# EAGLE board devboard_kw2xd_v2.1 (EAGLE 8.4.1)
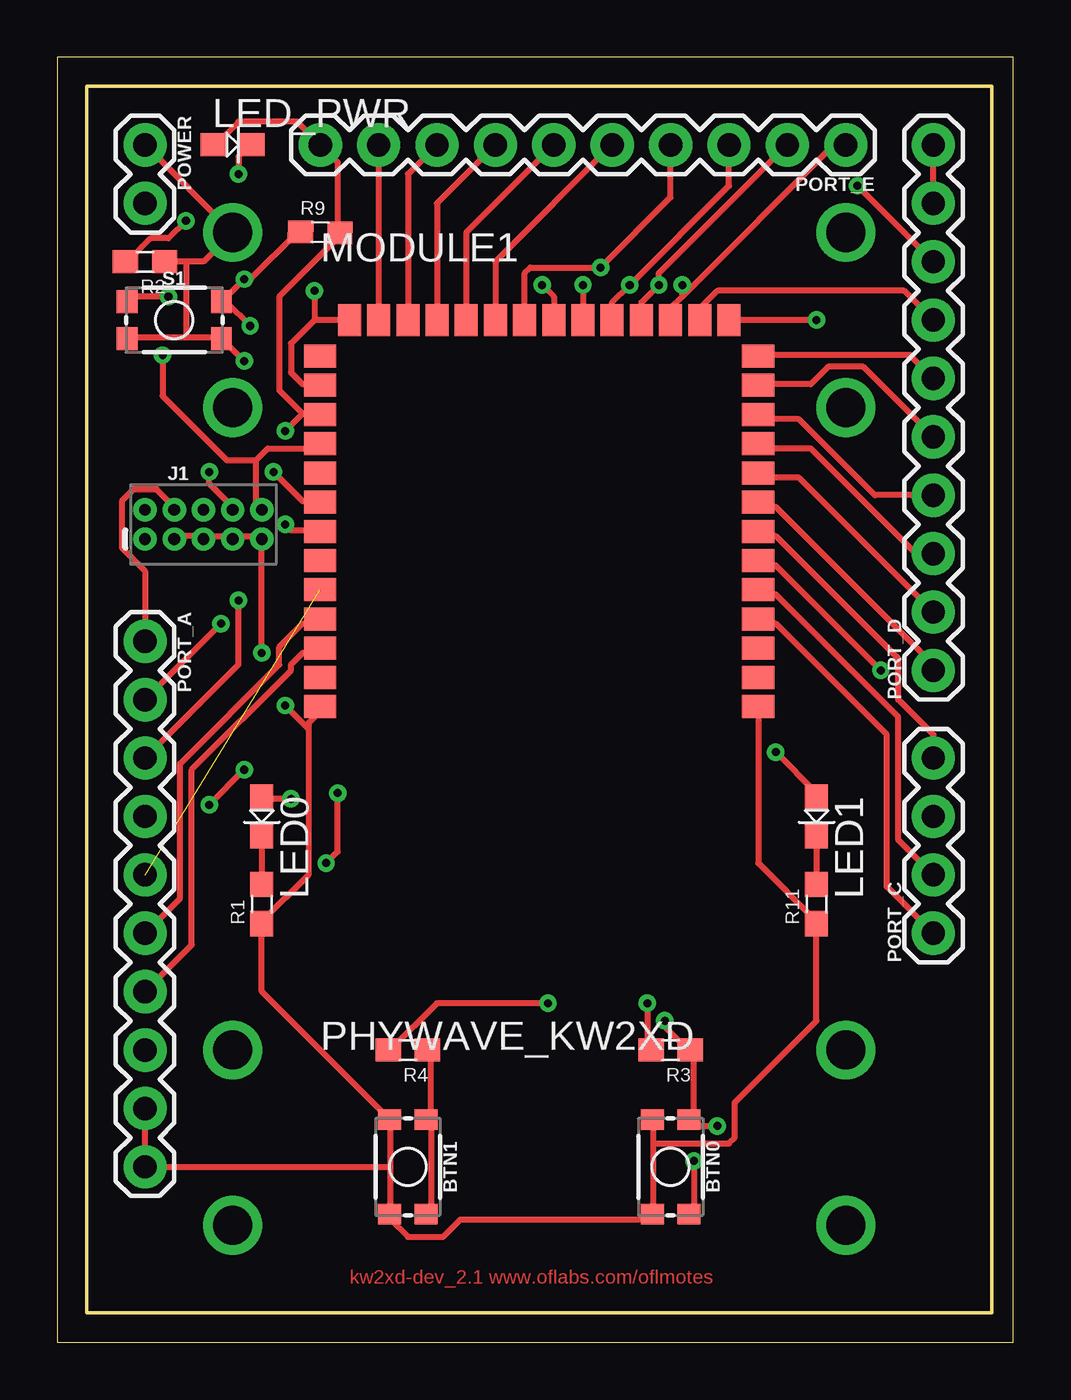
[diagram p0: board, top side]
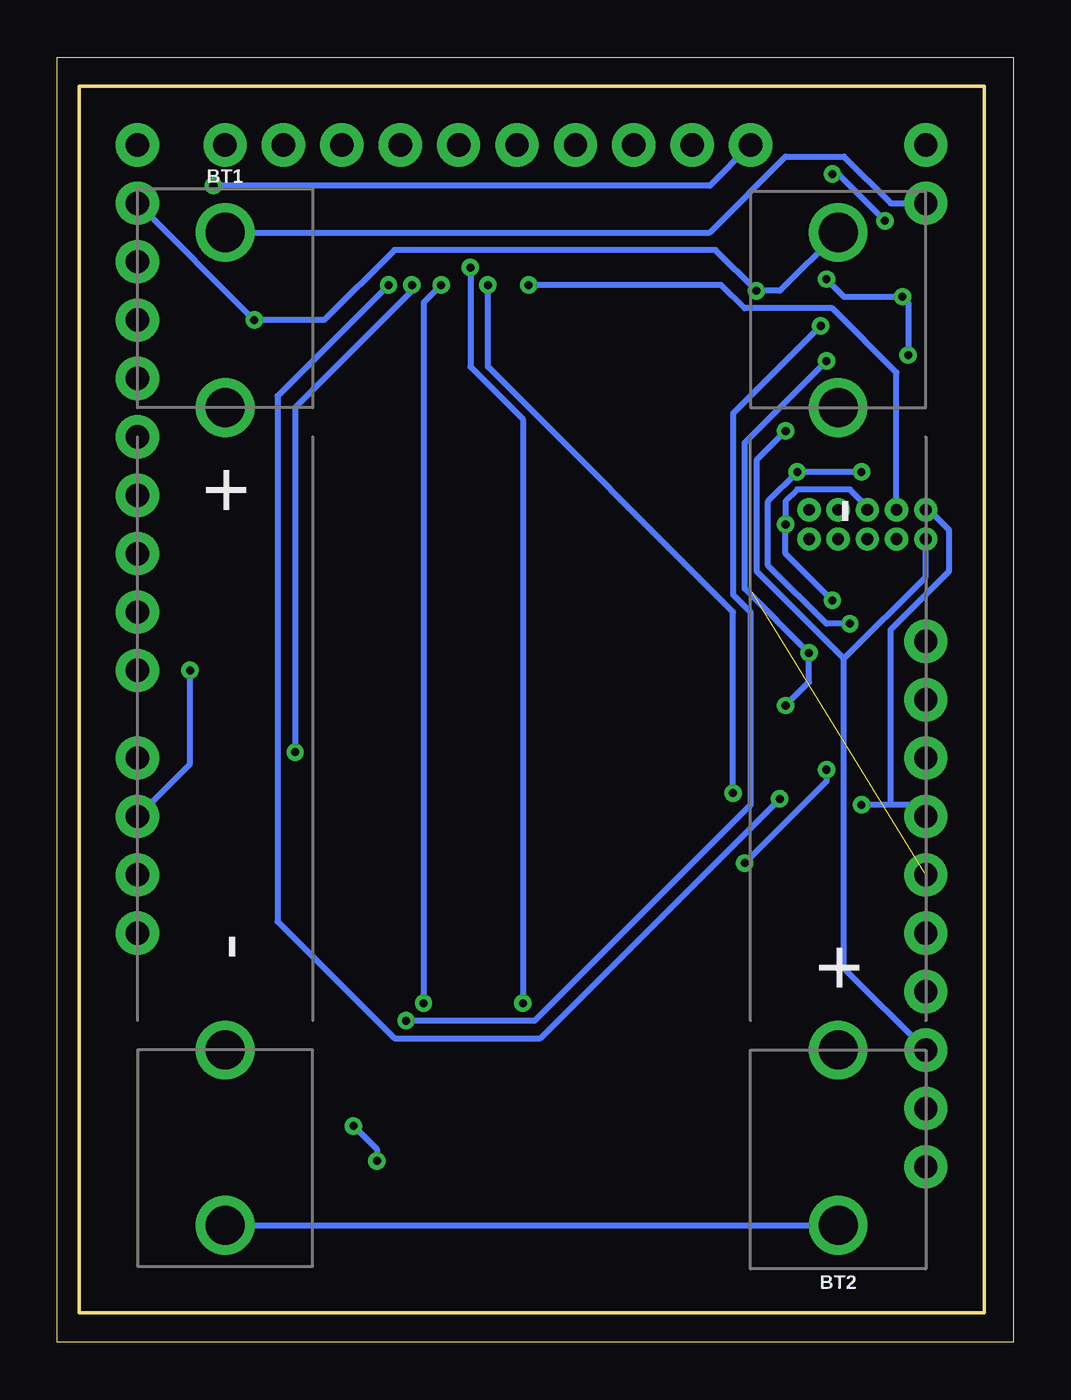
[diagram p1: board, bottom side, seen from below]

Size 41.58 x 55.87 mm. Coordinates in mm from the lower left corner, seen from the top.
Outline: 0,0 41.58,0 41.58,55.87 0,55.87 0,0
Outline: 1.27,54.61 40.64,54.61 40.64,1.27 1.27,1.27 1.27,54.61
Copper layers (1*16): Top 0.035mm / dielectric 1.5mm / Bottom 0.035mm
Design rules "default *": minimum track width 10mil, minimum drill 0.35mm, track to track 10mil, track to pad 10mil, pad to pad 10mil, via to via 10mil, smd to smd 10mil, copper to edge 40mil, drill to drill 10mil, minimum pad ring 10mil, minimum via ring 8mil, stop-mask expansion 4mil, vias tented up to drill 0mil, thermal gap 10mil
tKeepout: area 12.2,16.9 to 29.7,43.7; area 12.2,16.9 to 29.7,43.7; area 14.7,18.2 to 32.3,45
tRestrict: area 12.7,15.2 to 29.2,43.2

## Footprints (pad centres in the part's own frame; a part is rotated, then mirrored left to right if it is on the bottom)
BATTERY-AAA = drill 1.702: GND@1 21.59,0; GND@2 13.97,0; PWR@1 -21.59,0; PWR@2 -13.97,0
TACTILE_SWITCH_SMD_4.6X2.8MM = smd 0.9 x 1: 1 -2.05,-0.8; 2 2.05,-0.8; 3 2.05,0.8; 4 -2.05,0.8
2X5-PTH-1.27MM = drill 0.508 pad 1: 1 -2.54,-0.635; 2 -2.54,0.635; 3 -1.27,-0.635; 4 -1.27,0.635; 5 0,-0.635; 6 0,0.635; 7 1.27,-0.635; 8 1.27,0.635; 9 2.54,-0.635; 10 2.54,0.635
LED0603 = smd 1.1 x 1: A -0.85,0; C 0.85,0
PHYWAVE_KW2XD = smd 1.4 x 1: 1 19.05,-0.3; 2 19.05,0.97; 3 19.05,2.24; 4 19.05,3.51; 5 19.05,4.78; 6 19.05,6.05; 7 19.05,7.32; 8 19.05,8.59; 9 19.05,9.86; 10 19.05,11.13; 11 19.05,12.4; 12 19.05,13.67; 13 19.05,14.94; 28 0,14.94; 29 0,13.67; 30 0,12.4; 31 0,11.13; 32 0,9.86; 33 0,8.59; 34 0,7.32; 35 0,6.05; 36 0,4.78; 37 0,3.51; 38 0,2.24; 39 0,0.97; 40 0,-0.3 | smd 1 x 1.4: 14 17.78,16.51; 15 16.51,16.51; 16 15.24,16.51; 17 13.97,16.51; 18 12.7,16.51; 19 11.43,16.51; 20 10.16,16.51; 21 8.89,16.51; 22 7.62,16.51; 23 6.35,16.51; 24 5.08,16.51; 25 3.81,16.51; 26 2.54,16.51; 27 1.27,16.51
1X10 = drill 1.016 pad 1.88: 1 0,0; 2 2.54,0; 3 5.08,0; 4 7.62,0; 5 10.16,0; 6 12.7,0; 7 15.24,0; 8 17.78,0; 9 20.32,0; 10 22.86,0
1X04 = drill 1.016 pad 1.88: 1 0,0; 2 2.54,0; 3 5.08,0; 4 7.62,0
1X02 = drill 1.016 pad 1.88: 1 0,0; 2 2.54,0
SMD0603 = smd 1.1 x 1: 1 -0.85,0; 2 0.85,0

## Placement (x,y rotation side)
BT1  [BATTERY-AAA]  34.29,26.67 270 bottom
BT2  [BATTERY-AAA]  7.62,26.67 90 bottom
BTN0  KEY1  [TACTILE_SWITCH_SMD_4.6X2.8MM]  26.67,7.62 270 top
BTN1  KEY2  [TACTILE_SWITCH_SMD_4.6X2.8MM]  15.24,7.62 270 top
J1  CORTEX_DEBUG_PTH  [2X5-PTH-1.27MM]  6.35,35.56 0 top
LED0  RED  [LED0603]  8.89,22.86 270 top
LED1  GREEN  [LED0603]  33.02,22.86 270 top
LED_PWR  ORANGE  [LED0603]  7.62,52.07 0 top
MODULE1  PHYWAVE_KW2XD  [PHYWAVE_KW2XD]  11.43,27.94 0 top
PORT_A  [1X10]  3.81,30.48 270 top
PORT_C  [1X04]  38.1,17.78 90 top
PORT_D  [1X10]  38.1,29.21 90 top
PORT_E  [1X10]  34.29,52.07 180 top
POWER  [1X02]  3.81,52.07 270 top
R1  220  [SMD0603]  8.89,19.05 90 top
R2  220  [SMD0603]  3.81,46.99 180 top
R3  56k  [SMD0603]  26.67,12.7 180 top
R4  56k  [SMD0603]  15.24,12.7 180 top
R9  56k  [SMD0603]  11.43,48.26 358.8 top
R11  220  [SMD0603]  33.02,19.05 90 top
S1  RESET  [TACTILE_SWITCH_SMD_4.6X2.8MM]  5.08,44.45 0 top

## Library data of the parts
BT1 BT2 = SparkFun-Batteries; PROD_ID: BATT-08571; SF_SKU: PRT-12718
BTN0 BTN1 S1 = SparkFun-Switches; PROD_ID: SWCH-13065
J1 POWER = SparkFun-Connectors
LED0 LED1 LED_PWR R1-R4 R9 R11 = parts
MODULE1 = oflabs-phytec
PORT_A PORT_D PORT_E = SparkFun-Connectors; PROD_ID: CONN-11563
PORT_C = SparkFun-Connectors; PROD_ID: CONN-09696

## Nets
GND: BT2.GND@1 BTN0.1 BTN0.2 BTN1.1 BTN1.2 J1.3 J1.5 J1.7 J1.9 MODULE1.1 MODULE1.14 MODULE1.27 MODULE1.29 MODULE1.40 PORT_A.9 PORT_A.10 PORT_D.9 PORT_D.10 POWER.1 R1.1 R2.1 R11.1 S1.1 S1.2
N$1: LED0.C R1.2
N$2: LED_PWR.C R2.2
N$3: BT1.GND@1 BT2.PWR@1
N$20: LED1.C R11.2
NRST: BTN0.3 BTN0.4 J1.10 MODULE1.31 R3.1 R9.1 S1.3 S1.4
NRST1: BTN1.3 BTN1.4 R4.1
PTA0_SWDCLK: J1.4 MODULE1.20 PORT_A.1
PTA1_TDI: J1.8 MODULE1.33 PORT_A.2
PTA2_SWO: J1.6 MODULE1.34 PORT_A.3
PTA3_SWDIO: J1.2 MODULE1.19 PORT_A.4
PTA4: MODULE1.36 PORT_A.5
PTA18: MODULE1.37 PORT_A.6
PTA19: MODULE1.38 PORT_A.7
PTC4: MODULE1.4 PORT_C.1
PTC5: MODULE1.5 PORT_C.2
PTC6: MODULE1.6 PORT_C.3
PTC7: MODULE1.7 PORT_C.4
PTD1: MODULE1.8 PORT_D.1
PTD2: MODULE1.9 PORT_D.2
PTD3: MODULE1.10 PORT_D.3
PTD4: MODULE1.11 PORT_D.4
PTD5: MODULE1.12 PORT_D.5
PTD6: MODULE1.13 PORT_D.6
PTD7: MODULE1.15 PORT_D.7
PTE0: LED0.A MODULE1.16 PORT_E.1
PTE1: LED1.A MODULE1.17 PORT_E.2
PTE2: MODULE1.18 PORT_E.3 R3.2
PTE3: MODULE1.21 PORT_E.4 R4.2
PTE4: MODULE1.22 PORT_E.5
PTE16: MODULE1.23 PORT_E.6
PTE17: MODULE1.24 PORT_E.7
PTE18: MODULE1.25 PORT_E.8
PTE19: MODULE1.26 PORT_E.9
VBAT: BT1.PWR@1 POWER.2
VCC: J1.1 LED_PWR.A MODULE1.30 PORT_A.8 PORT_D.8 PORT_E.10 R9.2

## Tracks (layer width: path | path; a pad name or v marks a point on that pad's centre or on a via)
GND  (via drill 0.35)
  Top 0.254: v33.02,44.45 MODULE1.14 | PORT_D.9 PORT_D.10 | 11.18,44.45 10.16,43.43 10.16,42.16 10.67,41.66 11.43,41.66 MODULE1.29 | MODULE1.27 11.18,44.45 | 5.59,43.69 7.11,43.69 S1.2 7.37,43.43 v8.13,42.67 | 5.59,43.69 3.05,43.69 S1.1 | 5.59,46.99 6.35,46.99 BT2.GND@1 POWER.1 | 5.59,46.99 R2.1 | 5.59,46.99 5.59,43.69 | v11.18,45.72 11.18,44.45 | 6.35,35.05 5.08,35.05 J1.3 | 6.35,35.05 7.62,35.05 | 6.35,35.05 J1.5 | 7.62,35.05 8.89,35.05 J1.9 v8.89,29.97 | 7.62,35.05 J1.7 | 10.92,26.67 10.92,26.92 11.43,27.43 MODULE1.40 | 10.92,26.67 10.92,20.32 8.89,18.29 R1.1 8.89,15.24 14.22,9.91 BTN1.1 14.48,9.65 14.48,7.62 | 10.92,26.67 v9.91,27.69 | MODULE1.1 30.48,20.83 33.02,18.29 R11.1 33.02,13.97 29.46,10.41 29.46,8.89 29.21,8.64 25.91,8.64 | 25.91,8.64 25.91,9.65 BTN0.1 | 25.91,8.64 25.91,5.59 BTN0.2 25.65,5.33 17.53,5.33 16.76,4.57 15.24,4.57 14.48,5.33 BTN1.2 14.48,5.59 14.48,7.62 | 14.48,7.62 PORT_A.10 PORT_A.9
  Bottom 0.254: PORT_D.9 v33.02,44.45 29.97,44.45 26.92,47.5 12.95,47.5 v11.18,45.72 10.16,45.72 BT2.GND@1 | v9.91,27.69 8.89,28.7 v8.89,29.97 11.68,32.77 11.68,39.12 v8.13,42.67
N$1
  Top 0.254: LED0.C R1.2
N$2  (via drill 0.35)
  Top 0.254: v5.59,48.77 4.83,48.01 4.06,48.01 3.05,46.99 R2.2 | v7.87,50.8 7.87,51.56 8.38,52.07 LED_PWR.C
  Bottom 0.254: v5.59,48.77 7.62,50.8 v7.87,50.8
N$3
  Bottom 0.254: BT1.GND@1 BT2.PWR@1
N$20
  Top 0.254: LED1.C R11.2
NRST  (via drill 0.35)
  Top 0.254: v27.69,7.87 27.69,5.59 BTN0.3 | v28.7,9.4 27.94,9.4 27.69,9.65 BTN0.4 27.69,9.91 27.69,12.7 R3.1 27.43,12.7 26.42,13.72 v26.42,13.97 | 8.64,38.35 9.14,38.86 11.43,38.86 MODULE1.31 | 8.64,38.35 8.64,36.58 8.89,36.32 J1.10 | v4.83,45.47 3.05,45.47 S1.4 | R9.1 10.41,48.26 8.38,46.23 v8.13,46.23 7.37,45.47 S1.3 7.37,45.21 v8.38,44.2 | 8.64,38.35 7.37,38.35 4.57,41.15 v4.57,42.93
  Bottom 0.254: v27.69,7.87 27.69,8.38 v28.7,9.4 | v8.13,46.23 7.37,45.47 v4.83,45.47 4.57,45.21 v4.57,42.93 | v26.42,13.97 20.83,13.97 11.43,23.37 11.43,31.75 12.19,32.51 12.19,40.39 v8.38,44.2
NRST1
  Top 0.254: BTN1.3 16.26,5.59 16.26,9.65 BTN1.4 16.26,9.91 16.26,12.7 R4.1
PTA0_SWDCLK  (via drill 0.35)
  Top 0.254: MODULE1.20 21.59,45.47 v21.08,45.97 | PORT_A.1 3.81,33.53 2.79,34.54 2.79,36.58 3.3,37.08 4.32,37.08 5.08,36.32 J1.4
  Bottom 0.254: v21.08,45.97 12.7,45.97 11.68,44.96 7.87,44.96 5.08,42.16 J1.4
PTA1_TDI  (via drill 0.35)
  Top 0.254: v9.4,37.85 10.67,36.58 11.43,36.58 MODULE1.33 | v6.6,37.85 6.6,37.34 7.62,36.32 J1.8 | PORT_A.2 v7.11,31.24
  Bottom 0.254: v6.6,37.85 v9.4,37.85 10.67,36.58 10.67,33.78 8.13,31.24 v7.11,31.24
PTA2_SWO  (via drill 0.35)
  Top 0.254: v9.91,35.56 10.16,35.31 11.43,35.31 MODULE1.34 | v7.87,32.26 7.87,29.46 PORT_A.3
  Bottom 0.254: J1.6 6.35,36.32 7.11,37.08 9.4,37.08 9.91,36.58 v9.91,35.56 9.91,34.29 v7.87,32.26
PTA3_SWDIO  (via drill 0.35)
  Top 0.254: v22.86,45.97 MODULE1.19 | v12.19,23.88 12.19,21.34 v11.68,20.83 | v6.6,23.37 v8.13,24.89
  Bottom 0.254: v22.86,45.97 22.86,42.42 12.19,31.75 v12.19,23.88 | v11.68,20.83 8.13,24.38 v8.13,24.89 | 5.33,23.37 4.32,23.37 PORT_A.4 | 5.33,23.37 v6.6,23.37 | 5.33,23.37 5.33,30.99 2.79,33.53 2.79,35.31 3.56,36.07 3.81,36.07 J1.2
PTA4  (1 unrouted)
PTA18
  Top 0.254: PORT_A.6 5.33,19.3 5.33,25.15 9.65,29.46 9.65,30.23 10.67,31.24 11.43,31.24 MODULE1.37
PTA19
  Top 0.254: PORT_A.7 5.84,17.27 5.84,24.89 10.16,29.21 10.16,29.46 10.67,29.97 11.43,29.97 MODULE1.38
PTC4
  Top 0.254: PORT_C.1 36.07,19.81 36.07,26.42 31.24,31.24 30.48,31.24 MODULE1.4
PTC5
  Top 0.254: PORT_C.2 36.58,21.84 36.58,27.18 31.24,32.51 30.48,32.51 MODULE1.5
PTC6  (via drill 0.35)
  Top 0.254: v35.81,29.21 31.24,33.78 30.48,33.78 MODULE1.6
  Bottom 0.254: v35.81,29.21 35.81,25.15 PORT_C.3
PTC7
  Top 0.254: PORT_C.4 38.1,26.42 36.58,27.94 36.58,29.72 31.24,35.05 30.48,35.05 MODULE1.7
PTD1
  Top 0.254: PORT_D.1 38.1,29.46 31.24,36.32 30.48,36.32 MODULE1.8
PTD2
  Top 0.254: PORT_D.2 32.26,37.59 30.48,37.59 MODULE1.9
PTD3
  Top 0.254: PORT_D.3 37.34,34.29 32.77,38.86 30.48,38.86 MODULE1.10
PTD4
  Top 0.254: PORT_D.4 35.56,36.83 32.26,40.13 30.48,40.13 MODULE1.11
PTD5
  Top 0.254: PORT_D.5 35.05,42.42 33.53,42.42 32.77,41.66 30.48,41.66 MODULE1.12
PTD6
  Top 0.254: PORT_D.6 37.08,42.93 30.48,42.93 MODULE1.13
PTD7
  Top 0.254: MODULE1.15 27.94,44.96 28.7,45.72 36.83,45.72 PORT_D.7
PTE0  (via drill 0.35)
  Top 0.254: v10.16,23.62 8.89,23.62 LED0.A | 27.18,45.47 v27.18,45.97 | 27.18,45.47 26.67,44.96 MODULE1.16 | PORT_E.1 33.78,52.07 27.18,45.47
  Bottom 0.254: v10.16,23.62 20.57,13.21 26.92,13.21 32,18.29 32,41.15 v27.18,45.97
PTE1  (via drill 0.35)
  Top 0.254: v31.24,25.65 33.02,23.88 LED1.A | MODULE1.17 25.4,45.21 v26.16,45.97 26.16,46.48 PORT_E.2
  Bottom 0.254: v31.24,25.65 31.24,40.64 26.16,45.72 v26.16,45.97
PTE2  (via drill 0.35)
  Top 0.254: v25.65,14.73 25.65,12.7 R3.2 | MODULE1.18 24.13,45.21 v24.89,45.97 29.21,50.29 PORT_E.3
  Bottom 0.254: v25.65,14.73 25.65,45.21 v24.89,45.97
PTE3  (via drill 0.35)
  Top 0.254: v21.34,14.73 16.51,14.73 14.48,12.7 R4.2 | MODULE1.21 20.32,46.48 20.57,46.74 v23.62,46.74 26.67,49.78 PORT_E.4
  Bottom 0.254: v21.34,14.73 21.34,40.13 23.62,42.42 v23.62,46.74
PTE4
  Top 0.254: MODULE1.22 19.05,46.99 PORT_E.5
PTE16
  Top 0.254: MODULE1.23 17.78,48.26 PORT_E.6
PTE17
  Top 0.254: MODULE1.24 16.51,49.53 PORT_E.7
PTE18
  Top 0.254: MODULE1.25 15.24,50.8 PORT_E.8
PTE19
  Top 0.254: PORT_E.9 MODULE1.26
VBAT
  Bottom 0.254: POWER.2 5.33,49.53 7.37,51.56 9.91,51.56 13.21,48.26 BT1.PWR@1
VCC  (via drill 0.35)
  Top 0.254: LED_PWR.A 6.86,52.07 7.87,53.09 10.41,53.09 PORT_E.10 12.19,51.31 12.19,48.26 R9.2 12.19,48.01 9.65,45.47 9.65,41.4 10.67,40.39 | 10.67,40.39 11.43,40.39 MODULE1.30 | v34.8,50.29 PORT_D.8 | 10.67,40.39 v9.91,39.62
  Bottom 0.254: J1.1 3.81,33.27 7.37,29.72 | 7.37,29.72 7.37,16.26 PORT_A.8 | v34.8,50.29 13.21,50.29 PORT_E.10 | 7.37,29.72 11.18,33.53 11.18,38.35 v9.91,39.62

## Text on the board
Top: kw2xd-dev_2.1 www.oflabs.com/oflmotes